# EAGLE board painelFramenovo (EAGLE 5.10)
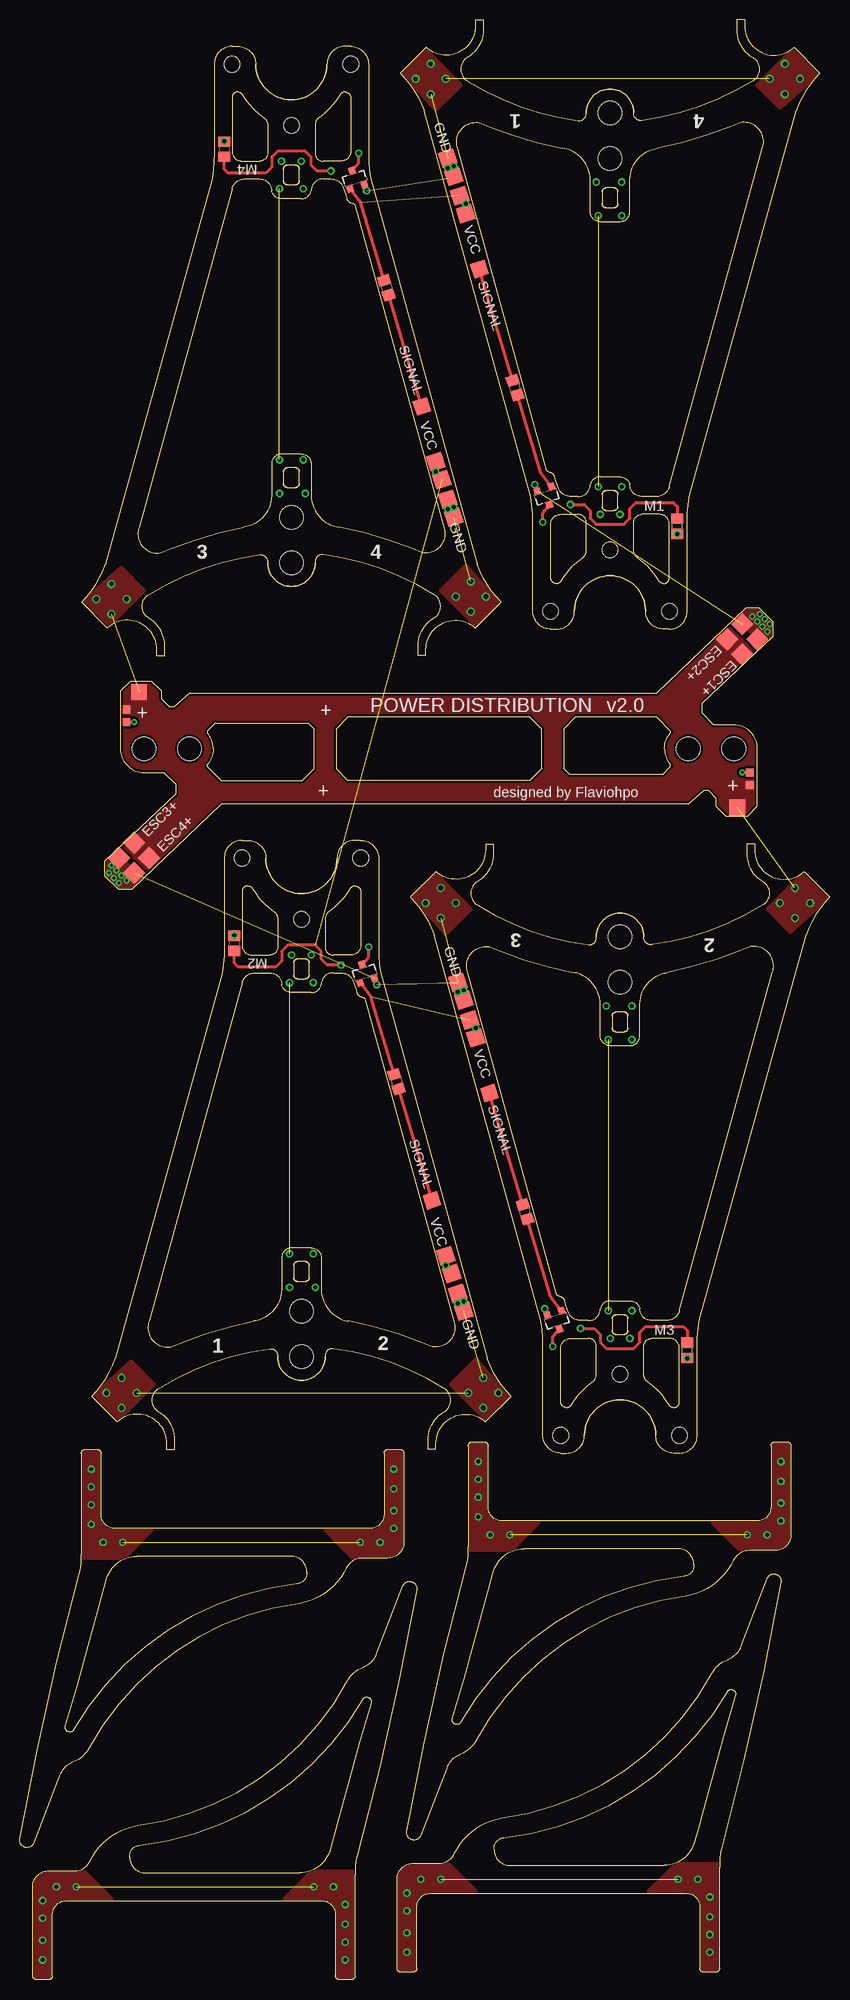
[diagram p0: board, top side]
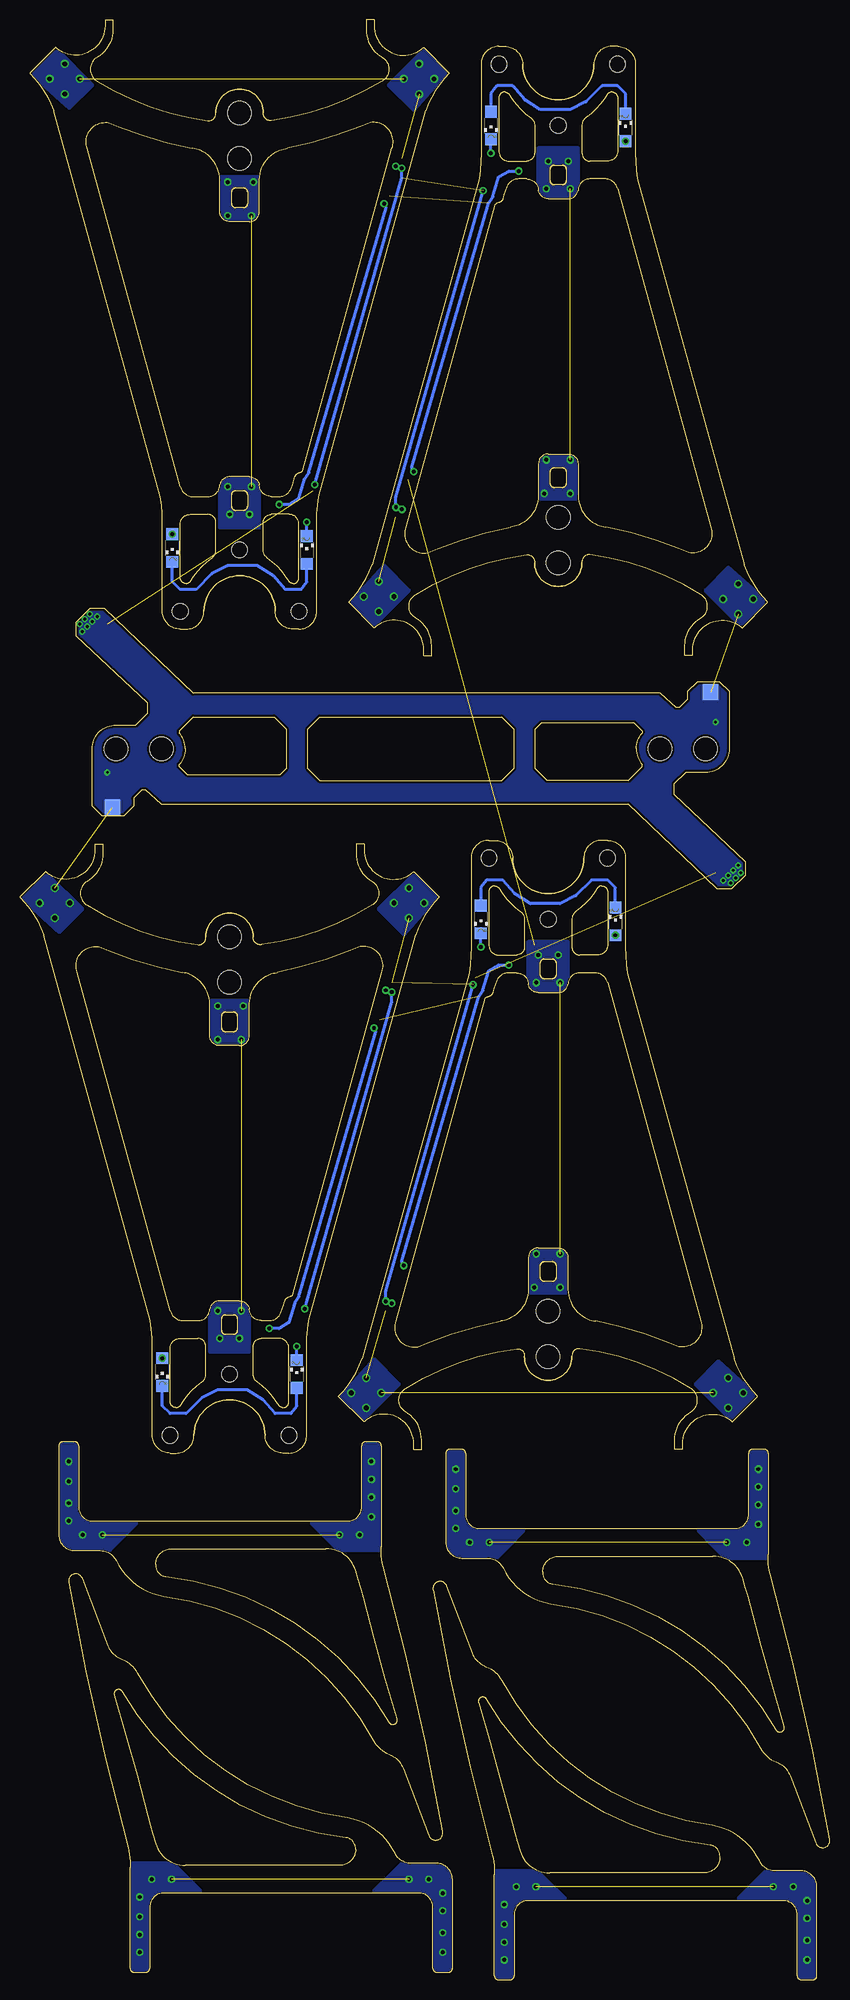
[diagram p1: board, bottom side, seen from below]

Size 102.34 x 247.68 mm. Coordinates in mm from the lower left corner, seen from the top.
Outline: 72.84,131.79 arc-103 71.84,130.79 arc-24 57.84,135.79 arc-119 57.84,138.79 arc59 59.84,142.29 59.84,142.79 59.84,143.54 58.84,143.54 58.84,142.79 arc-133 52.59,140.04 49.34,136.79 arc-25 52.34,132.04 65.84,83.29 arc-9 66.09,80.04 66.09,68.79 arc90 68.34,66.54 69.09,66.54 arc90 71.34,68.79
Outline: 93.84,138.79 arc-119 93.84,135.79
Outline: 78.84,131.79 arc180 72.84,131.79
Outline: 80.34,68.79 arc180 71.34,68.79
Outline: 75.34,84.04 arc90 74.84,83.54
Outline: 74.84,82.04 arc90 75.34,81.54
Outline: 76.34,81.54 arc90 76.84,82.04
Outline: 76.84,83.54 arc90 76.34,84.04
Outline: 75.34,122.29 arc90 74.84,121.79
Outline: 74.84,120.29 arc90 75.34,119.79
Outline: 76.34,119.79 arc90 76.84,120.29
Outline: 76.84,121.79 arc90 76.34,122.29
Outline: 76.34,84.04 arc-90 76.84,83.54
Outline: 76.84,82.04 arc-90 76.34,81.54
Outline: 75.34,81.54 arc-90 74.84,82.04
Outline: 74.84,83.54 arc-90 75.34,84.04
Outline: 76.34,122.29 arc-90 76.84,121.79
Outline: 76.84,120.29 arc-90 76.34,119.79
Outline: 75.34,119.79 arc-90 74.84,120.29
Outline: 74.84,121.79 arc-90 75.34,122.29
Outline: 93.84,138.79 arc-119 93.84,135.79
Outline: 93.84,135.79 arc-24 79.84,130.79
Outline: 79.84,130.79 arc-103 78.84,131.79
Outline: 72.84,131.79 arc-180 78.84,131.79
Outline: 71.34,68.79 arc-180 80.34,68.79
Outline: 95.09,127.29 arc120 92.34,130.54
Outline: 91.09,130.04 arc-10 81.84,127.29
Outline: 81.84,127.29 arc13 80.84,127.04 arc66 78.34,123.29 78.34,119.29 arc-90 77.09,118.04 74.59,118.04 arc-90 73.34,119.29 73.34,123.29 arc66 70.84,127.04 arc13 69.84,127.29 arc-10 60.59,130.04 59.34,130.54 arc120 56.59,127.29 67.84,86.54 arc25 68.34,86.29 arc-62 68.84,85.79 arc8 69.34,84.29 arc67 70.84,83.29 71.84,83.29 arc90 73.34,84.79 arc-77 74.59,85.79 77.09,85.79 arc-77 78.34,84.79 arc90 79.84,83.29 81.84,83.29 arc70 83.34,84.54 95.09,127.29
Outline: 76.34,84.04 arc-90 76.84,83.54
Outline: 76.84,82.04 arc-90 76.34,81.54
Outline: 75.34,81.54 arc-90 74.84,82.04
Outline: 74.84,83.54 arc-90 75.34,84.04
Outline: 76.34,122.29 arc-90 76.84,121.79
Outline: 76.84,120.29 arc-90 76.34,119.79
Outline: 75.34,119.79 arc-90 74.84,120.29
Outline: 74.84,121.79 arc-90 75.34,122.29
Outline: 75.34,84.04 arc90 74.84,83.54
Outline: 74.84,83.54 74.84,82.04
Outline: 74.84,82.04 arc90 75.34,81.54
Outline: 75.34,81.54 76.34,81.54
Outline: 76.34,81.54 arc90 76.84,82.04
Outline: 76.84,82.04 76.84,83.54
Outline: 76.84,83.54 arc90 76.34,84.04
Outline: 76.34,84.04 75.34,84.04
Outline: 75.34,122.29 arc90 74.84,121.79
Outline: 74.84,121.79 74.84,120.29
Outline: 74.84,120.29 arc90 75.34,119.79
Outline: 75.34,119.79 76.34,119.79
Outline: 76.34,119.79 arc90 76.84,120.29
Outline: 76.84,120.29 76.84,121.79
Outline: 76.84,121.79 arc90 76.34,122.29
Outline: 76.34,122.29 75.34,122.29
Outline: 80.34,68.79 arc90 82.59,66.54 83.34,66.54 arc90 85.59,68.79 85.59,80.04 arc-9 85.84,83.29 99.34,132.04 arc-25 102.34,136.79 99.09,140.04 arc-133 92.84,142.79 92.84,143.54 91.84,143.54 91.84,142.79 91.84,142.29 arc59 93.84,138.79
Outline: 93.84,138.79 arc-119 93.84,135.79
Outline: 93.84,135.79 arc-24 79.84,130.79
Outline: 95.09,127.29 arc120 92.34,130.54
Outline: 92.34,130.54 91.09,130.04
Outline: 91.09,130.04 arc-10 81.84,127.29
Outline: 93.2,155.57 arc90 90.2,158.57
Outline: 93.2,155.57 arc90 90.2,158.57
Outline: 90.2,158.57 87.7,158.57 86.2,160.07 86.2,161.32 95.2,169.82 95.2,171.57 93.45,173.32 91.7,173.32 80.45,162.57 21.45,162.57 19.45,160.82 18.95,160.82 17.95,161.82 17.95,162.82 16.7,164.07 13.95,164.07 12.7,162.82 12.7,155.57 arc90 15.7,152.57 18.2,152.57 19.7,151.07 19.7,149.82 10.7,141.32 10.7,139.57 12.45,137.82 14.2,137.82 25.45,148.57 84.45,148.57 86.45,150.32 86.95,150.32 87.95,149.32 87.95,148.32 89.2,147.07 91.95,147.07 93.2,148.32 93.2,155.57
Outline: 38.58,78.74 arc-103 39.58,79.74 arc-24 53.58,74.74 arc-119 53.58,71.74 arc59 51.58,68.24 51.58,67.74 51.58,66.99 52.58,66.99 52.58,67.74 arc-133 58.83,70.49 62.08,73.74 arc-25 59.08,78.49 45.58,127.24 arc-9 45.33,130.49 45.33,141.74 arc90 43.08,143.99 42.33,143.99 arc90 40.08,141.74
Outline: 17.58,71.74 arc-119 17.58,74.74
Outline: 32.58,78.74 arc180 38.58,78.74
Outline: 31.08,141.74 arc180 40.08,141.74
Outline: 36.08,126.49 arc90 36.58,126.99
Outline: 36.58,128.49 arc90 36.08,128.99
Outline: 35.08,128.99 arc90 34.58,128.49
Outline: 34.58,126.99 arc90 35.08,126.49
Outline: 36.08,88.24 arc90 36.58,88.74
Outline: 36.58,90.24 arc90 36.08,90.74
Outline: 35.08,90.74 arc90 34.58,90.24
Outline: 34.58,88.74 arc90 35.08,88.24
Outline: 35.08,126.49 arc-90 34.58,126.99
Outline: 34.58,128.49 arc-90 35.08,128.99
Outline: 36.08,128.99 arc-90 36.58,128.49
Outline: 36.58,126.99 arc-90 36.08,126.49
Outline: 35.08,88.24 arc-90 34.58,88.74
Outline: 34.58,90.24 arc-90 35.08,90.74
Outline: 36.08,90.74 arc-90 36.58,90.24
Outline: 36.58,88.74 arc-90 36.08,88.24
Outline: 17.58,71.74 arc-119 17.58,74.74
Outline: 17.58,74.74 arc-24 31.58,79.74
Outline: 31.58,79.74 arc-103 32.58,78.74
Outline: 38.58,78.74 arc-180 32.58,78.74
Outline: 40.08,141.74 arc-180 31.08,141.74
Outline: 16.33,83.24 arc120 19.08,79.99
Outline: 20.33,80.49 arc-10 29.58,83.24
Outline: 29.58,83.24 arc13 30.58,83.49 arc66 33.08,87.24 33.08,91.24 arc-90 34.33,92.49 36.83,92.49 arc-90 38.08,91.24 38.08,87.24 arc66 40.58,83.49 arc13 41.58,83.24 arc-10 50.83,80.49 52.08,79.99 arc120 54.83,83.24 43.58,123.99 arc25 43.08,124.24 arc-62 42.58,124.74 arc8 42.08,126.24 arc67 40.58,127.24 39.58,127.24 arc90 38.08,125.74 arc-77 36.83,124.74 34.33,124.74 arc-77 33.08,125.74 arc90 31.58,127.24 29.58,127.24 arc70 28.08,125.99 16.33,83.24
Outline: 35.08,126.49 arc-90 34.58,126.99
Outline: 34.58,128.49 arc-90 35.08,128.99
Outline: 36.08,128.99 arc-90 36.58,128.49
Outline: 36.58,126.99 arc-90 36.08,126.49
Outline: 35.08,88.24 arc-90 34.58,88.74
Outline: 34.58,90.24 arc-90 35.08,90.74
Outline: 36.08,90.74 arc-90 36.58,90.24
Outline: 36.58,88.74 arc-90 36.08,88.24
Outline: 36.08,126.49 arc90 36.58,126.99
Outline: 36.58,126.99 36.58,128.49
Outline: 36.58,128.49 arc90 36.08,128.99
Outline: 36.08,128.99 35.08,128.99
Outline: 35.08,128.99 arc90 34.58,128.49
Outline: 34.58,128.49 34.58,126.99
Outline: 34.58,126.99 arc90 35.08,126.49
Outline: 35.08,126.49 36.08,126.49
Outline: 36.08,88.24 arc90 36.58,88.74
Outline: 36.58,88.74 36.58,90.24
Outline: 36.58,90.24 arc90 36.08,90.74
Outline: 36.08,90.74 35.08,90.74
Outline: 35.08,90.74 arc90 34.58,90.24
Outline: 34.58,90.24 34.58,88.74
Outline: 34.58,88.74 arc90 35.08,88.24
Outline: 35.08,88.24 36.08,88.24
Outline: 31.08,141.74 arc90 28.83,143.99 28.08,143.99 arc90 25.83,141.74 25.83,130.49 arc-9 25.58,127.24 12.08,78.49 arc-25 9.08,73.74 12.33,70.49 arc-133 18.58,67.74 18.58,66.99 19.58,66.99 19.58,67.74 19.58,68.24 arc59 17.58,71.74
Outline: 17.58,71.74 arc-119 17.58,74.74
Outline: 17.58,74.74 arc-24 31.58,79.74
Outline: 16.33,83.24 arc120 19.08,79.99
Outline: 19.08,79.99 20.33,80.49
Outline: 20.33,80.49 arc-10 29.58,83.24
Outline: 37.31,179.07 arc-103 38.31,180.07 arc-24 52.31,175.07 arc-119 52.31,172.07 arc59 50.31,168.57 50.31,168.07 50.31,167.32 51.31,167.32 51.31,168.07 arc-133 57.56,170.82 60.81,174.07 arc-25 57.81,178.82 44.31,227.57 arc-9 44.06,230.82 44.06,242.07 arc90 41.81,244.32 41.06,244.32 arc90 38.81,242.07
Outline: 16.31,172.07 arc-119 16.31,175.07
Outline: 31.31,179.07 arc180 37.31,179.07
Outline: 29.81,242.07 arc180 38.81,242.07
Outline: 34.81,226.82 arc90 35.31,227.32
Outline: 35.31,228.82 arc90 34.81,229.32
Outline: 33.81,229.32 arc90 33.31,228.82
Outline: 33.31,227.32 arc90 33.81,226.82
Outline: 34.81,188.57 arc90 35.31,189.07
Outline: 35.31,190.57 arc90 34.81,191.07
Outline: 33.81,191.07 arc90 33.31,190.57
Outline: 33.31,189.07 arc90 33.81,188.57
Outline: 33.81,226.82 arc-90 33.31,227.32
Outline: 33.31,228.82 arc-90 33.81,229.32
Outline: 34.81,229.32 arc-90 35.31,228.82
Outline: 35.31,227.32 arc-90 34.81,226.82
Outline: 33.81,188.57 arc-90 33.31,189.07
Outline: 33.31,190.57 arc-90 33.81,191.07
Outline: 34.81,191.07 arc-90 35.31,190.57
Outline: 35.31,189.07 arc-90 34.81,188.57
Outline: 16.31,172.07 arc-119 16.31,175.07
Outline: 16.31,175.07 arc-24 30.31,180.07
Outline: 30.31,180.07 arc-103 31.31,179.07
Outline: 37.31,179.07 arc-180 31.31,179.07
Outline: 38.81,242.07 arc-180 29.81,242.07
Outline: 15.06,183.57 arc120 17.81,180.32
Outline: 19.06,180.82 arc-10 28.31,183.57
Outline: 28.31,183.57 arc13 29.31,183.82 arc66 31.81,187.57 31.81,191.57 arc-90 33.06,192.82 35.56,192.82 arc-90 36.81,191.57 36.81,187.57 arc66 39.31,183.82 arc13 40.31,183.57 arc-10 49.56,180.82 50.81,180.32 arc120 53.56,183.57 42.31,224.32 arc25 41.81,224.57 arc-62 41.31,225.07 arc8 40.81,226.57 arc67 39.31,227.57 38.31,227.57 arc90 36.81,226.07 arc-77 35.56,225.07 33.06,225.07 arc-77 31.81,226.07 arc90 30.31,227.57 28.31,227.57 arc70 26.81,226.32 15.06,183.57
Outline: 33.81,226.82 arc-90 33.31,227.32
Outline: 33.31,228.82 arc-90 33.81,229.32
Outline: 34.81,229.32 arc-90 35.31,228.82
Outline: 35.31,227.32 arc-90 34.81,226.82
Outline: 33.81,188.57 arc-90 33.31,189.07
Outline: 33.31,190.57 arc-90 33.81,191.07
Outline: 34.81,191.07 arc-90 35.31,190.57
Outline: 35.31,189.07 arc-90 34.81,188.57
Outline: 34.81,226.82 arc90 35.31,227.32
Outline: 35.31,227.32 35.31,228.82
Outline: 35.31,228.82 arc90 34.81,229.32
Outline: 34.81,229.32 33.81,229.32
Outline: 33.81,229.32 arc90 33.31,228.82
Outline: 33.31,228.82 33.31,227.32
Outline: 33.31,227.32 arc90 33.81,226.82
Outline: 33.81,226.82 34.81,226.82
Outline: 34.81,188.57 arc90 35.31,189.07
Outline: 35.31,189.07 35.31,190.57
Outline: 35.31,190.57 arc90 34.81,191.07
Outline: 34.81,191.07 33.81,191.07
Outline: 33.81,191.07 arc90 33.31,190.57
Outline: 33.31,190.57 33.31,189.07
Outline: 33.31,189.07 arc90 33.81,188.57
Outline: 33.81,188.57 34.81,188.57
Outline: 29.81,242.07 arc90 27.56,244.32 26.81,244.32 arc90 24.56,242.07 24.56,230.82 arc-9 24.31,227.57 10.81,178.82 arc-25 7.81,174.07 11.06,170.82 arc-133 17.31,168.07 17.31,167.32 18.31,167.32 18.31,168.07 18.31,168.57 arc59 16.31,172.07
Outline: 16.31,172.07 arc-119 16.31,175.07
Outline: 16.31,175.07 arc-24 30.31,180.07
Outline: 15.06,183.57 arc120 17.81,180.32
Outline: 17.81,180.32 19.06,180.82
Outline: 19.06,180.82 arc-10 28.31,183.57
Outline: 71.57,235.93 arc-103 70.57,234.93 arc-24 56.57,239.93 arc-119 56.57,242.93 arc59 58.57,246.43 58.57,246.93 58.57,247.68 57.57,247.68 57.57,246.93 arc-133 51.32,244.18 48.07,240.93 arc-25 51.07,236.18 64.57,187.43 arc-9 64.82,184.18 64.82,172.93 arc90 67.07,170.68 67.82,170.68 arc90 70.07,172.93
Outline: 92.57,242.93 arc-119 92.57,239.93
Outline: 77.57,235.93 arc180 71.57,235.93
Outline: 79.07,172.93 arc180 70.07,172.93
Outline: 74.07,188.18 arc90 73.57,187.68
Outline: 73.57,186.18 arc90 74.07,185.68
Outline: 75.07,185.68 arc90 75.57,186.18
Outline: 75.57,187.68 arc90 75.07,188.18
Outline: 74.07,226.43 arc90 73.57,225.93
Outline: 73.57,224.43 arc90 74.07,223.93
Outline: 75.07,223.93 arc90 75.57,224.43
Outline: 75.57,225.93 arc90 75.07,226.43
Outline: 75.07,188.18 arc-90 75.57,187.68
Outline: 75.57,186.18 arc-90 75.07,185.68
Outline: 74.07,185.68 arc-90 73.57,186.18
Outline: 73.57,187.68 arc-90 74.07,188.18
Outline: 75.07,226.43 arc-90 75.57,225.93
Outline: 75.57,224.43 arc-90 75.07,223.93
Outline: 74.07,223.93 arc-90 73.57,224.43
Outline: 73.57,225.93 arc-90 74.07,226.43
Outline: 92.57,242.93 arc-119 92.57,239.93
Outline: 92.57,239.93 arc-24 78.57,234.93
Outline: 78.57,234.93 arc-103 77.57,235.93
Outline: 71.57,235.93 arc-180 77.57,235.93
Outline: 70.07,172.93 arc-180 79.07,172.93
Outline: 93.82,231.43 arc120 91.07,234.68
Outline: 89.82,234.18 arc-10 80.57,231.43
Outline: 80.57,231.43 arc13 79.57,231.18 arc66 77.07,227.43 77.07,223.43 arc-90 75.82,222.18 73.32,222.18 arc-90 72.07,223.43 72.07,227.43 arc66 69.57,231.18 arc13 68.57,231.43 arc-10 59.32,234.18 58.07,234.68 arc120 55.32,231.43 66.57,190.68 arc25 67.07,190.43 arc-62 67.57,189.93 arc8 68.07,188.43 arc67 69.57,187.43 70.57,187.43 arc90 72.07,188.93 arc-77 73.32,189.93 75.82,189.93 arc-77 77.07,188.93 arc90 78.57,187.43 80.57,187.43 arc70 82.07,188.68 93.82,231.43
Outline: 75.07,188.18 arc-90 75.57,187.68
Outline: 75.57,186.18 arc-90 75.07,185.68
Outline: 74.07,185.68 arc-90 73.57,186.18
Outline: 73.57,187.68 arc-90 74.07,188.18
Outline: 75.07,226.43 arc-90 75.57,225.93
Outline: 75.57,224.43 arc-90 75.07,223.93
Outline: 74.07,223.93 arc-90 73.57,224.43
Outline: 73.57,225.93 arc-90 74.07,226.43
Outline: 74.07,188.18 arc90 73.57,187.68
Outline: 73.57,187.68 73.57,186.18
Outline: 73.57,186.18 arc90 74.07,185.68
Outline: 74.07,185.68 75.07,185.68
Outline: 75.07,185.68 arc90 75.57,186.18
Outline: 75.57,186.18 75.57,187.68
Outline: 75.57,187.68 arc90 75.07,188.18
Outline: 75.07,188.18 74.07,188.18
Outline: 74.07,226.43 arc90 73.57,225.93
Outline: 73.57,225.93 73.57,224.43
Outline: 73.57,224.43 arc90 74.07,223.93
Outline: 74.07,223.93 75.07,223.93
Outline: 75.07,223.93 arc90 75.57,224.43
Outline: 75.57,224.43 75.57,225.93
Outline: 75.57,225.93 arc90 75.07,226.43
Outline: 75.07,226.43 74.07,226.43
Outline: 79.07,172.93 arc90 81.32,170.68 82.07,170.68 arc90 84.32,172.93 84.32,184.18 arc-9 84.57,187.43 98.07,236.18 arc-25 101.07,240.93 97.82,244.18 arc-133 91.57,246.93 91.57,247.68 90.57,247.68 90.57,246.93 90.57,246.43 arc59 92.57,242.93
Outline: 92.57,242.93 arc-119 92.57,239.93
Outline: 92.57,239.93 arc-24 78.57,234.93
Outline: 93.82,231.43 arc120 91.07,234.68
Outline: 91.07,234.68 89.82,234.18
Outline: 89.82,234.18 arc-10 80.57,231.43
Outline: 69.09,72.29 arc37 69.59,72.54 arc-23 72.34,75.54 arc58 72.84,76.54 72.84,80.04 arc90 71.84,81.04 69.59,81.04 arc90 68.34,79.79 68.34,73.04 arc90 69.09,72.29
Outline: 82.59,72.29 arc-37 82.09,72.54 arc23 79.34,75.54 arc-58 78.84,76.54 78.84,80.04 arc-90 79.84,81.04 82.09,81.04 arc-90 83.34,79.79 83.34,73.04 arc-90 82.59,72.29
Outline: 24.45,155.57 arc41 23.7,157.57 23.7,157.82 24.7,158.82 36.45,158.82 37.2,158.07 37.2,153.07 35.7,151.57 25.45,151.57 23.7,153.32 23.7,153.57 arc41 24.45,155.57
Outline: 39.95,158.07 41.45,159.57 64.45,159.57 65.95,158.07 65.95,153.07 64.45,151.57 41.45,151.57 39.95,153.07 39.95,158.07
Outline: 81.2,152.32 69.45,152.32 68.7,153.07 68.7,158.07 70.2,159.57 80.45,159.57 82.2,157.82 82.2,157.57 arc41 81.45,155.57 arc41 82.2,153.57 82.2,153.32 81.2,152.32
Outline: 42.33,138.24 arc37 41.83,137.99 arc-23 39.08,134.99 arc58 38.58,133.99 38.58,130.49 arc90 39.58,129.49 41.83,129.49 arc90 43.08,130.74 43.08,137.49 arc90 42.33,138.24
Outline: 28.83,138.24 arc-37 29.33,137.99 arc23 32.08,134.99 arc-58 32.58,133.99 32.58,130.49 arc-90 31.58,129.49 29.33,129.49 arc-90 28.08,130.74 28.08,137.49 arc-90 28.83,138.24
Outline: 41.06,238.57 arc37 40.56,238.32 arc-23 37.81,235.32 arc58 37.31,234.32 37.31,230.82 arc90 38.31,229.82 40.56,229.82 arc90 41.81,231.07 41.81,237.82 arc90 41.06,238.57
Outline: 27.56,238.57 arc-37 28.06,238.32 arc23 30.81,235.32 arc-58 31.31,234.32 31.31,230.82 arc-90 30.31,229.82 28.06,229.82 arc-90 26.81,231.07 26.81,237.82 arc-90 27.56,238.57
Outline: 67.82,176.43 arc37 68.32,176.68 arc-23 71.07,179.68 arc58 71.57,180.68 71.57,184.18 arc90 70.57,185.18 68.32,185.18 arc90 67.07,183.93 67.07,177.18 arc90 67.82,176.43
Outline: 81.32,176.43 arc-37 80.82,176.68 arc23 78.07,179.68 arc-58 77.57,180.68 77.57,184.18 arc-90 78.57,185.18 80.82,185.18 arc-90 82.07,183.93 82.07,177.18 arc-90 81.32,176.43
Outline: 56.66,67.48 arc-90 57.16,67.98 58.66,67.98 arc-90 59.16,67.48 59.16,59.73 arc90 60.91,57.98 93.16,57.98 arc90 94.91,59.73 94.91,67.48 arc-90 95.41,67.98 96.91,67.98 arc-90 97.41,67.48 97.41,56.23 arc-90 95.41,54.23 92.16,54.23 arc64 90.16,52.98 arc-54 84.16,48.48 arc54 57.66,30.23 arc-41 55.66,28.48 arc48 53.91,26.73 50.66,18.23 arc-170 48.91,18.73 arc-5 56.41,52.23 arc16 56.66,53.98 arc0 56.66,54.73 56.66,67.48
Outline: 85.16,52.48 arc90 83.16,54.48 63.66,54.48 arc73 59.91,51.73 arc3 58.91,48.23 arc-2 54.66,32.98 arc160 55.66,32.48 arc-53 83.91,50.98 arc90 85.16,52.48
Outline: 7.77,66.52 arc-90 8.27,67.02 9.77,67.02 arc-90 10.27,66.52 10.27,58.77 arc90 12.02,57.02 44.27,57.02 arc90 46.02,58.77 46.02,66.52 arc-90 46.52,67.02 48.02,67.02 arc-90 48.52,66.52 48.52,55.27 arc-90 46.52,53.28 43.27,53.28 arc64 41.27,52.03 arc-54 35.27,47.53 arc54 8.77,29.28 arc-41 6.77,27.53 arc48 5.02,25.78 1.77,17.27 arc-170 0.02,17.77 arc-5 7.52,51.28 arc16 7.77,53.03 arc0 7.77,53.78 7.77,66.52
Outline: 36.27,51.53 arc90 34.27,53.53 14.77,53.53 arc73 11.02,50.78 arc3 10.02,47.28 arc-2 5.77,32.03 arc160 6.77,31.53 arc-53 35.02,50.03 arc90 36.27,51.53
Outline: 88.42,1.45 arc-90 87.92,0.95 86.42,0.95 arc-90 85.92,1.45 85.92,9.2 arc90 84.17,10.95 51.92,10.95 arc90 50.17,9.2 50.17,1.45 arc-90 49.67,0.95 48.17,0.95 arc-90 47.67,1.45 47.67,12.7 arc-90 49.67,14.7 52.92,14.7 arc64 54.92,15.95 arc-54 60.92,20.45 arc54 87.42,38.7 arc-41 89.42,40.45 arc48 91.17,42.2 94.42,50.7 arc-170 96.17,50.2 arc-5 88.67,16.7 arc16 88.42,14.95 arc0 88.42,14.2 88.42,1.45
Outline: 59.92,16.45 arc90 61.92,14.45 81.42,14.45 arc73 85.17,17.2 arc3 86.17,20.7 arc-2 90.42,35.95 arc160 89.42,36.45 arc-53 61.17,17.95 arc90 59.92,16.45
Outline: 42.38,0.5 arc-90 41.88,0 40.38,0 arc-90 39.88,0.5 39.88,8.25 arc90 38.13,10 5.88,10 arc90 4.13,8.25 4.13,0.5 arc-90 3.63,0 2.13,0 arc-90 1.63,0.5 1.63,11.75 arc-90 3.63,13.75 6.88,13.75 arc64 8.88,15 arc-54 14.88,19.5 arc54 41.38,37.75 arc-41 43.38,39.5 arc48 45.13,41.25 48.38,49.75 arc-170 50.13,49.25 arc-5 42.63,15.75 arc16 42.38,14 arc0 42.38,13.25 42.38,0.5
Outline: 13.88,15.5 arc90 15.88,13.5 35.38,13.5 arc73 39.13,16.25 arc3 40.13,19.75 arc-2 44.38,35 arc160 43.38,35.5 arc-53 15.13,17 arc90 13.88,15.5
Copper layers (1*16): Top 0.035mm / dielectric 1.5mm / Bottom 0.035mm
Design rules "default *": minimum track width 10mil, minimum drill 24mil, track to track 8mil, track to pad 8mil, pad to pad 8mil, via to via 8mil, smd to smd 8mil, copper to edge 5mil, drill to drill 8mil, minimum pad ring 10mil, minimum via ring 8mil, stop-mask expansion 4mil, vias tented up to drill 14mil, thermal gap 10mil
Holes 3 mm at 75.84,131.79 75.84,126.04 75.84,126.04 75.84,131.79 75.84,126.04 75.84,126.04 84.45,155.57 21.45,155.57 90.2,155.57 15.7,155.57 15.7,155.57 21.45,155.57 15.7,155.57 15.7,155.57 90.2,155.57 84.45,155.57 84.45,155.57 90.2,155.57 84.45,155.57 84.45,155.57 21.45,155.57 15.7,155.57 15.7,155.57 21.45,155.57 21.45,155.57 15.7,155.57 21.45,155.57 21.45,155.57 21.45,155.57 84.45,155.57 15.7,155.57 90.2,155.57 90.2,155.57 84.45,155.57 90.2,155.57 90.2,155.57 15.7,155.57 21.45,155.57 21.45,155.57 15.7,155.57 21.45,155.57 21.45,155.57 84.45,155.57 90.2,155.57 90.2,155.57 84.45,155.57 84.45,155.57 90.2,155.57 84.45,155.57 84.45,155.57 84.45,155.57 90.2,155.57 90.2,155.57 84.45,155.57 90.2,155.57 90.2,155.57 84.45,155.57 90.2,155.57 90.2,155.57 84.45,155.57 84.45,155.57 90.2,155.57 84.45,155.57 84.45,155.57 84.45,155.57 90.2,155.57 90.2,155.57 84.45,155.57 84.45,155.57 90.2,155.57 84.45,155.57 84.45,155.57 35.58,78.74 35.58,84.49 35.58,84.49 35.58,78.74 35.58,84.49 35.58,84.49 34.31,179.07 34.31,184.82 34.31,184.82 34.31,179.07 34.31,184.82 34.31,184.82 74.57,235.93 74.57,230.18 74.57,230.18 74.57,235.93 74.57,230.18 74.57,230.18
Holes 2 mm at 68.34,68.79 75.84,76.54 75.84,76.54 83.34,68.79 75.84,76.54 75.84,76.54 43.08,141.74 35.58,133.99 35.58,133.99 28.08,141.74 35.58,133.99 35.58,133.99 41.81,242.07 34.31,234.32 34.31,234.32 26.81,242.07 34.31,234.32 34.31,234.32 67.07,172.93 74.57,180.68 74.57,180.68 82.07,172.93 74.57,180.68 74.57,180.68

## Footprints (pad centres in the part's own frame; a part is rotated, then mirrored left to right if it is on the bottom)
TP20SQ = smd 2 x 2: TP 0,0
TP10SQ = smd 1 x 1: TP 0,0
CHIPLED_1206 = smd 1.5 x 1.5: A 0,-1.75; C 0,1.75
SOT23-3 = smd 0.8 x 0.9: 1 -0.95,-1; 2 0.95,-1; 3 0,1.1
R0805 = smd 1.3 x 1.5: 1 -0.95,0; 2 0.95,0
TP19SQ = smd 1.9 x 1.9: TP 0,0

## Placement (x,y rotation side)
BAT1+  TPSQTP20SQ  [TP20SQ]  15.07,162.74 0 top
BAT1-  TPSQTP20SQ  [TP20SQ]  15.07,162.74 0 bottom
BAT2+  TPSQTP20SQ  [TP20SQ]  90.64,148.13 0 top
BAT2-  TPSQTP20SQ  [TP20SQ]  90.64,148.13 0 bottom
BRD1+  TPSQTP10SQ  [TP10SQ]  13.48,160.51 0 top
BRD1-  TPSQTP10SQ  [TP10SQ]  13.48,158.93 0 top
BRD2+  TPSQTP10SQ  [TP10SQ]  92.22,150.99 0 top
BRD2-  TPSQTP10SQ  [TP10SQ]  92.22,152.58 0 top
ESC1+  TPSQTP20SQ  [TP20SQ]  91.27,167.5 225 top
ESC1-  TPSQTP20SQ  [TP20SQ]  93.18,169.4 135 top
ESC2+  TPSQTP20SQ  [TP20SQ]  89.37,169.4 225 top
ESC2-  TPSQTP20SQ  [TP20SQ]  91.27,171.31 315 top
ESC3+  TPSQTP20SQ  [TP20SQ]  14.44,143.69 225 top
ESC3-  TPSQTP20SQ  [TP20SQ]  12.53,141.78 315 top
ESC4+  TPSQTP20SQ  [TP20SQ]  16.34,141.78 45 top
ESC4-  TPSQTP20SQ  [TP20SQ]  14.44,139.88 135 top
GND  TPTP20SQ  [TP20SQ]  55.34,126.04 288 top
GND1  TPTP20SQ  [TP20SQ]  56.08,84.49 108 top
GND2  TPTP20SQ  [TP20SQ]  54.81,184.82 108 top
GND3  TPTP20SQ  [TP20SQ]  54.07,230.18 288 top
GNDL  TPTP20SQ  [TP20SQ]  56.09,123.79 288 top
GNDL1  TPTP20SQ  [TP20SQ]  55.33,86.74 108 top
GNDL2  TPTP20SQ  [TP20SQ]  54.06,187.07 108 top
GNDL3  TPTP20SQ  [TP20SQ]  54.82,227.93 288 top
LF1  [CHIPLED_1206]  67.34,76.54 0 bottom
LF2  [CHIPLED_1206]  84.34,76.79 180 bottom
LF3  [CHIPLED_1206]  44.08,133.99 180 bottom
LF4  [CHIPLED_1206]  27.08,133.74 0 bottom
LF5  [CHIPLED_1206]  42.81,234.32 180 bottom
LF6  [CHIPLED_1206]  25.81,234.07 0 bottom
LF7  [CHIPLED_1206]  66.07,180.68 0 bottom
LF8  [CHIPLED_1206]  83.07,180.93 180 bottom
Q1  [SOT23-3]  67.84,83.29 198 top
Q2  [SOT23-3]  43.58,127.24 18 top
Q3  [SOT23-3]  42.31,227.57 18 top
Q4  [SOT23-3]  66.57,187.43 198 top
R1  330R  [R0805]  27.08,130.99 270 top
R2  330R  [R0805]  84.34,79.54 90 top
R3  330R  [R0805]  47.58,113.49 288 top
R4  330R  [R0805]  25.81,231.32 270 top
R5  330R  [R0805]  46.31,213.82 288 top
R6  330R  [R0805]  63.84,97.04 108 top
R7  330R  [R0805]  83.07,183.68 90 top
R8  330R  [R0805]  62.57,201.18 108 top
TLB  TPSQTP19SQ  [TP19SQ]  59.34,112.04 288 top
TLB1  TPSQTP19SQ  [TP19SQ]  52.08,98.49 108 top
TLB2  TPSQTP19SQ  [TP19SQ]  50.81,198.82 108 top
TLB3  TPSQTP19SQ  [TP19SQ]  58.07,216.18 288 top
VCC  TPTP20SQ  [TP20SQ]  56.84,121.29 288 top
VCC1  TPTP20SQ  [TP20SQ]  54.58,89.24 108 top
VCC2  TPTP20SQ  [TP20SQ]  53.31,189.57 108 top
VCC3  TPTP20SQ  [TP20SQ]  55.57,225.43 288 top
VCCL  TPTP20SQ  [TP20SQ]  57.59,119.04 288 top
VCCL1  TPTP20SQ  [TP20SQ]  53.83,91.49 108 top
VCCL2  TPTP20SQ  [TP20SQ]  52.56,191.82 108 top
VCCL3  TPTP20SQ  [TP20SQ]  56.32,223.18 288 top

## Library data of the parts
BAT1+ BAT1- BAT2+ BAT2- BRD1+ BRD1- BRD2+ BRD2- ESC1+ ESC1- ESC2+ ESC2- ESC3+ ESC3- ESC4+ ESC4- GND GND1-GND3 GNDL GNDL1-GNDL3 TLB TLB1-TLB3 VCC VCC1-VCC3 VCCL VCCL1-VCCL3 = testpad
LF1-LF8 = led
Q1-Q4 = SparkFun
R1-R8 = rcl

## Nets
GND: BAT1-.TP BAT2-.TP BRD1-.TP BRD2-.TP ESC1-.TP ESC2-.TP ESC3-.TP ESC4-.TP GND1.TP GND2.TP GND3.TP GND.TP GNDL1.TP GNDL2.TP GNDL3.TP GNDL.TP Q1.2 Q2.2 Q3.2 Q4.2
N$1: R6.2 TLB.TP
N$3: LF3.A LF4.C
N$4: LF1.A LF2.C
N$5: LF1.C Q1.3
N$6: LF2.A R2.1
N$7: Q1.1 R6.1
N$8: LF3.C Q2.3
N$9: LF4.A R1.1
N$10: Q2.1 R3.1
N$11: R3.2 TLB1.TP
N$13: LF5.A LF6.C
N$14: LF5.C Q3.3
N$15: LF6.A R4.1
N$16: Q3.1 R5.1
N$17: R5.2 TLB2.TP
N$19: LF7.A LF8.C
N$20: LF7.C Q4.3
N$21: LF8.A R7.1
N$22: Q4.1 R8.1
N$23: R8.2 TLB3.TP
VCC: R1.2 R2.2 R4.2 R7.2 VCC1.TP VCC2.TP VCC3.TP VCC.TP VCCL1.TP VCCL2.TP VCCL3.TP VCCL.TP
VCC4: BAT1+.TP BAT2+.TP BRD1+.TP BRD2+.TP ESC1+.TP ESC2+.TP ESC3+.TP ESC4+.TP

## Tracks (layer width: path | path; a pad name or v marks a point on that pad's centre or on a via)
GND  (via drill 0.36, 0.5, 0.6)  (12 unrouted)
  Top 0.406: Q1.2 v66.34,84.79 | v56.09,125.04 GNDL.TP | v55.34,124.79 GND.TP | v45.08,125.74 Q2.2 | v55.33,85.49 GNDL1.TP | GND1.TP v56.08,85.74 | v43.81,226.07 Q3.2 | v54.06,185.82 GNDL2.TP | v54.81,186.07 GND2.TP | Q4.2 v65.07,188.93 | v54.82,229.18 GNDL3.TP | v54.07,228.93 GND3.TP | BRD1-.TP v14.44,158.93 | BRD2-.TP v91.27,152.58
  Bottom 0.406: v66.34,84.79 55.34,123.54 v55.34,124.79 v56.09,125.04 | v45.08,125.74 56.08,86.99 v56.08,85.74 v55.33,85.49 | v43.81,226.07 54.81,187.32 v54.81,186.07 v54.06,185.82 | v65.07,188.93 54.07,227.68 v54.07,228.93 v54.82,229.18
  other vias: 11.58,140.83 12.21,140.19 12.85,139.56 13.48,138.92 12.53,138.61 11.9,139.24 11.26,139.88 94.45,170.36 93.81,170.99 93.18,171.62 92.54,172.26 93.49,172.58 94.13,171.94 94.76,171.31 96.67,242.11 98.57,240.21 96.67,238.3 94.76,240.21 12.85,76.06 14.75,74.15 12.85,72.25 10.94,74.15 58.57,76.06 60.47,74.15 58.57,72.25 56.66,74.15 53.17,137.97 55.08,136.06 53.17,134.16 51.27,136.06 97.94,137.97 99.84,136.06 97.94,134.16 96.03,136.06 11.58,176.39 13.48,174.48 11.58,172.58 9.67,174.48 56.98,176.71 58.89,174.8 56.98,172.9 55.08,174.8 51.9,242.11 53.81,240.21 51.9,238.3 50,240.21
  pour Bottom (isolate 0.305, no thermals): 98.26,173.53 94.45,146.86 87.46,142.73 83.65,147.81 29.04,147.81 15.39,134.16 6.18,134.16 6.18,161.78 7.45,166.86 16.34,166.86 20.15,164.32 79.84,164.32 94.13,176.07
  pour Top (no thermals): 10.94,139.56 12.53,137.97 14.12,137.97 15.39,139.24 12.21,142.42 11.9,142.42 10.94,141.46
  pour Top (no thermals): 95.08,171.62 93.49,173.21 91.91,173.21 90.64,171.94 93.81,168.77 94.13,168.77 95.08,169.72
  pour Bottom: 17.08,75.24 12.58,70.74 9.33,73.99 14.08,78.24
  pour Top: 17.08,75.24 12.58,70.74 9.33,73.99 14.08,78.24
  pour Bottom: 58.83,70.74 54.33,75.24 57.58,78.49 61.83,73.74
  pour Top: 58.83,70.74 54.33,75.24 57.58,78.49 61.83,73.74
  pour Bottom: 52.59,139.79 57.09,135.29 53.84,132.04 49.59,136.79
  pour Top: 52.59,139.79 57.09,135.29 53.84,132.04 49.59,136.79
  pour Bottom: 94.34,135.29 98.84,139.79 102.09,136.54 97.34,132.29
  pour Top: 94.34,135.29 98.84,139.79 102.09,136.54 97.34,132.29
  pour Bottom: 15.81,175.57 11.31,171.07 8.06,174.32 12.81,178.57
  pour Top: 15.81,175.57 11.31,171.07 8.06,174.32 12.81,178.57
  pour Bottom: 57.56,171.07 53.06,175.57 56.31,178.82 60.56,174.07
  pour Top: 57.56,171.07 53.06,175.57 56.31,178.82 60.56,174.07
  pour Bottom: 93.07,239.43 97.57,243.93 100.82,240.68 96.07,236.43
  pour Top: 93.07,239.43 97.57,243.93 100.82,240.68 96.07,236.43
  pour Bottom: 51.32,243.93 55.82,239.43 52.57,236.18 48.32,240.93
  pour Top: 51.32,243.93 55.82,239.43 52.57,236.18 48.32,240.93
GND1  (via drill 0.5)  (1 unrouted)
  other vias: 91.91,56.23 94.41,56.23 96.16,57.98 96.16,60.23 96.16,62.98 96.16,65.48 61.91,56.23 59.41,56.23 57.91,58.48 57.91,60.98 57.91,63.23 57.91,65.48
  pour Bottom: 99.41,54.23 90.91,54.23 86.16,58.98 66.91,58.98 62.16,54.23 55.66,54.23 55.66,68.73 99.41,68.73
  pour Top: 99.41,54.23 90.91,54.23 86.16,58.98 66.91,58.98 62.16,54.23 55.66,54.23 55.66,68.73 99.41,68.73
GND2  (via drill 0.5)  (1 unrouted)
  other vias: 43.02,55.27 45.52,55.27 47.27,57.02 47.27,59.27 47.27,62.02 47.27,64.52 13.02,55.27 10.52,55.27 9.02,57.52 9.02,60.02 9.02,62.27 9.02,64.52
  pour Bottom: 50.52,53.28 42.02,53.28 37.27,58.02 18.02,58.02 13.27,53.28 6.77,53.28 6.77,67.77 50.52,67.77
  pour Top: 50.52,53.28 42.02,53.28 37.27,58.02 18.02,58.02 13.27,53.28 6.77,53.28 6.77,67.77 50.52,67.77
GND3  (via drill 0.5)  (1 unrouted)
  other vias: 53.17,12.7 50.67,12.7 48.92,10.95 48.92,8.7 48.92,5.95 48.92,3.45 83.17,12.7 85.67,12.7 87.17,10.45 87.17,7.95 87.17,5.7 87.17,3.45
  pour Bottom: 45.67,14.7 54.17,14.7 58.92,9.95 78.17,9.95 82.92,14.7 89.42,14.7 89.42,0.2 45.67,0.2
  pour Top: 45.67,14.7 54.17,14.7 58.92,9.95 78.17,9.95 82.92,14.7 89.42,14.7 89.42,0.2 45.67,0.2
GND4  (via drill 0.5)  (1 unrouted)
  other vias: 7.13,11.75 4.63,11.75 2.88,10 2.88,7.75 2.88,5 2.88,2.5 37.13,11.75 39.63,11.75 41.13,9.5 41.13,7 41.13,4.75 41.13,2.5
  pour Bottom: -0.37,13.75 8.13,13.75 12.88,9 32.13,9 36.88,13.75 43.38,13.75 43.38,-0.75 -0.37,-0.75
  pour Top: -0.37,13.75 8.13,13.75 12.88,9 32.13,9 36.88,13.75 43.38,13.75 43.38,-0.75 -0.37,-0.75
N$1
  Top 0.406: R6.2 TLB.TP
N$3
  Bottom 0.406: LF3.A 44.08,137.99 43.33,138.99 41.33,138.99 39.83,137.24 37.83,135.99 34.08,135.99 32.08,136.99 30.08,138.99 28.08,138.99 27.08,137.99 LF4.C
N$4
  Bottom 0.406: LF1.A 67.34,72.54 68.09,71.54 70.09,71.54 71.59,73.29 73.59,74.54 77.34,74.54 79.34,73.54 81.34,71.54 83.34,71.54 84.34,72.54 LF2.C
N$5  (via drill 0.5)
  Top 0.406: Q1.3 67.34,81.29 v67.34,80.04
  Bottom 0.406: LF1.C v67.34,80.04
N$6  (via drill 0.5)
  Top 0.406: R2.1 LF2.A
  other vias: 84.34,78.54
N$7
  Top 0.406: R6.1 67.09,86.29 Q1.1
N$8  (via drill 0.5)
  Top 0.406: Q2.3 44.08,129.24 v44.08,130.49
  Bottom 0.406: v44.08,130.49 LF3.C
N$9  (via drill 0.5)
  Top 0.406: R1.1 LF4.A
  other vias: 27.08,131.99
N$10
  Top 0.406: R3.1 44.33,124.24 Q2.1
N$11
  Top 0.406: TLB1.TP R3.2
N$13
  Bottom 0.406: LF5.A 42.81,238.32 42.06,239.32 40.06,239.32 38.56,237.57 36.56,236.32 32.81,236.32 30.81,237.32 28.81,239.32 26.81,239.32 25.81,238.32 LF6.C
N$14  (via drill 0.5)
  Top 0.406: Q3.3 42.81,229.57 v42.81,230.82
  Bottom 0.406: v42.81,230.82 LF5.C
N$15  (via drill 0.5)
  Top 0.406: R4.1 LF6.A
  other vias: 25.81,232.32
N$16
  Top 0.406: R5.1 43.06,224.57 Q3.1
N$17
  Top 0.406: TLB2.TP R5.2
N$19
  Bottom 0.406: LF7.A 66.07,176.68 66.82,175.68 68.82,175.68 70.32,177.43 72.32,178.68 76.07,178.68 78.07,177.68 80.07,175.68 82.07,175.68 83.07,176.68 LF8.C
N$20  (via drill 0.5)
  Top 0.406: Q4.3 66.07,185.43 v66.07,184.18
  Bottom 0.406: LF7.C v66.07,184.18
N$21  (via drill 0.5)
  Top 0.406: R7.1 LF8.A
  other vias: 83.07,182.68
N$22
  Top 0.406: R8.1 65.82,190.43 Q4.1
N$23
  Top 0.406: R8.2 TLB3.TP
PLANO  (via drill 0.5)  (1 unrouted)
  other vias: 77.34,84.54 77.09,81.04 74.59,81.04 74.34,84.54 77.34,123.04 77.34,118.79 74.34,118.79 74.09,123.04
  pour Bottom: 78.34,123.79 72.59,123.79 72.59,116.79 79.34,116.79
  pour Bottom: 77.84,87.04 73.34,86.79 73.34,79.29 78.34,79.29 78.34,86.79
PLANO1  (via drill 0.5)  (1 unrouted)
  other vias: 34.08,125.99 34.33,129.49 36.83,129.49 37.08,125.99 34.08,87.49 34.08,91.74 37.08,91.74 37.33,87.49
  pour Bottom: 33.08,86.74 38.83,86.74 38.83,93.74 32.08,93.74
  pour Bottom: 33.58,123.49 38.08,123.74 38.08,131.24 33.08,131.24 33.08,123.74
PLANO2  (via drill 0.5)  (1 unrouted)
  other vias: 32.81,226.32 33.06,229.82 35.56,229.82 35.81,226.32 32.81,187.82 32.81,192.07 35.81,192.07 36.06,187.82
  pour Bottom: 31.81,187.07 37.56,187.07 37.56,194.07 30.81,194.07
  pour Bottom: 32.31,223.82 36.81,224.07 36.81,231.57 31.81,231.57 31.81,224.07
PLANO3  (via drill 0.5)  (1 unrouted)
  other vias: 76.07,188.68 75.82,185.18 73.32,185.18 73.07,188.68 76.07,227.18 76.07,222.93 73.07,222.93 72.82,227.18
  pour Bottom: 77.07,227.93 71.32,227.93 71.32,220.93 78.07,220.93
  pour Bottom: 76.57,191.18 72.07,190.93 72.07,183.43 77.07,183.43 77.07,190.93
VCC  (via drill 0.5)  (3 unrouted)
  Top 0.406: R2.2 84.34,82.04 83.84,82.54 79.09,82.54 78.34,81.79 78.34,80.54 77.59,79.79 74.09,79.79 73.34,80.54 73.34,81.54 72.59,82.29 v70.84,82.29 | VCC.TP v57.59,120.29 VCCL.TP | R1.2 27.08,128.49 27.58,127.99 32.33,127.99 33.08,128.74 33.08,129.99 33.83,130.74 37.33,130.74 38.08,129.99 38.08,128.99 38.83,128.24 v40.58,128.24 | VCC1.TP v53.83,90.24 VCCL1.TP | R7.2 83.07,186.18 82.57,186.68 77.82,186.68 77.07,185.93 77.07,184.68 76.32,183.93 72.82,183.93 72.07,184.68 72.07,185.68 71.32,186.43 v69.57,186.43 | VCC3.TP v56.32,224.43 VCCL3.TP | R4.2 25.81,228.82 26.31,228.32 31.06,228.32 31.81,229.07 31.81,230.32 32.56,231.07 36.06,231.07 36.81,230.32 36.81,229.32 37.56,228.57 v39.31,228.57 | VCC2.TP v52.56,190.57 VCCL2.TP
  Bottom 0.406: v70.84,82.29 69.59,82.29 68.34,83.04 67.59,85.54 67.09,86.29 57.34,119.79 v57.59,120.29 | v40.58,128.24 41.83,128.24 43.08,127.49 43.83,124.99 44.33,124.24 54.08,90.74 v53.83,90.24 | v69.57,186.43 68.32,186.43 67.07,187.18 66.32,189.68 65.82,190.43 56.07,223.93 v56.32,224.43 | v39.31,228.57 40.56,228.57 41.81,227.82 42.56,225.32 43.06,224.57 52.81,191.07 v52.56,190.57
VCC4
  pour Top (isolate 0.305, no thermals): 16.34,166.86 18.88,164.32 78.57,164.32 95.4,177.34 98.26,173.53 95.72,146.86 88.73,142.73 86.19,146.54 27.77,146.54 12.85,131.62 7.45,137.97 7.45,166.86

## Text on the board
tNames: 1 | 4 | M4 | SIGNAL | SIGNAL | M1 | 3 | 4 | POWER DISTRIBUTION | v2.0 | + | + | + | + | designed by Flaviohpo | 3 | 2 | M2 | SIGNAL | SIGNAL | M3 | 1 | 2
_tNames: GND | VCC | VCC | GND | GND | VCC | VCC | GND